# Altium PCB PCB1.PcbDoc
Units mm, origin at the board's own origin, x right, y up, seen from the top; angles counter-clockwise.
Board outline 40 x 40 mm, 2 copper layers (Top Layer, Bottom Layer); 13 components, 11 nets, 38 pads, 0 vias.
Unrouted connection lines stored in the file: 5.
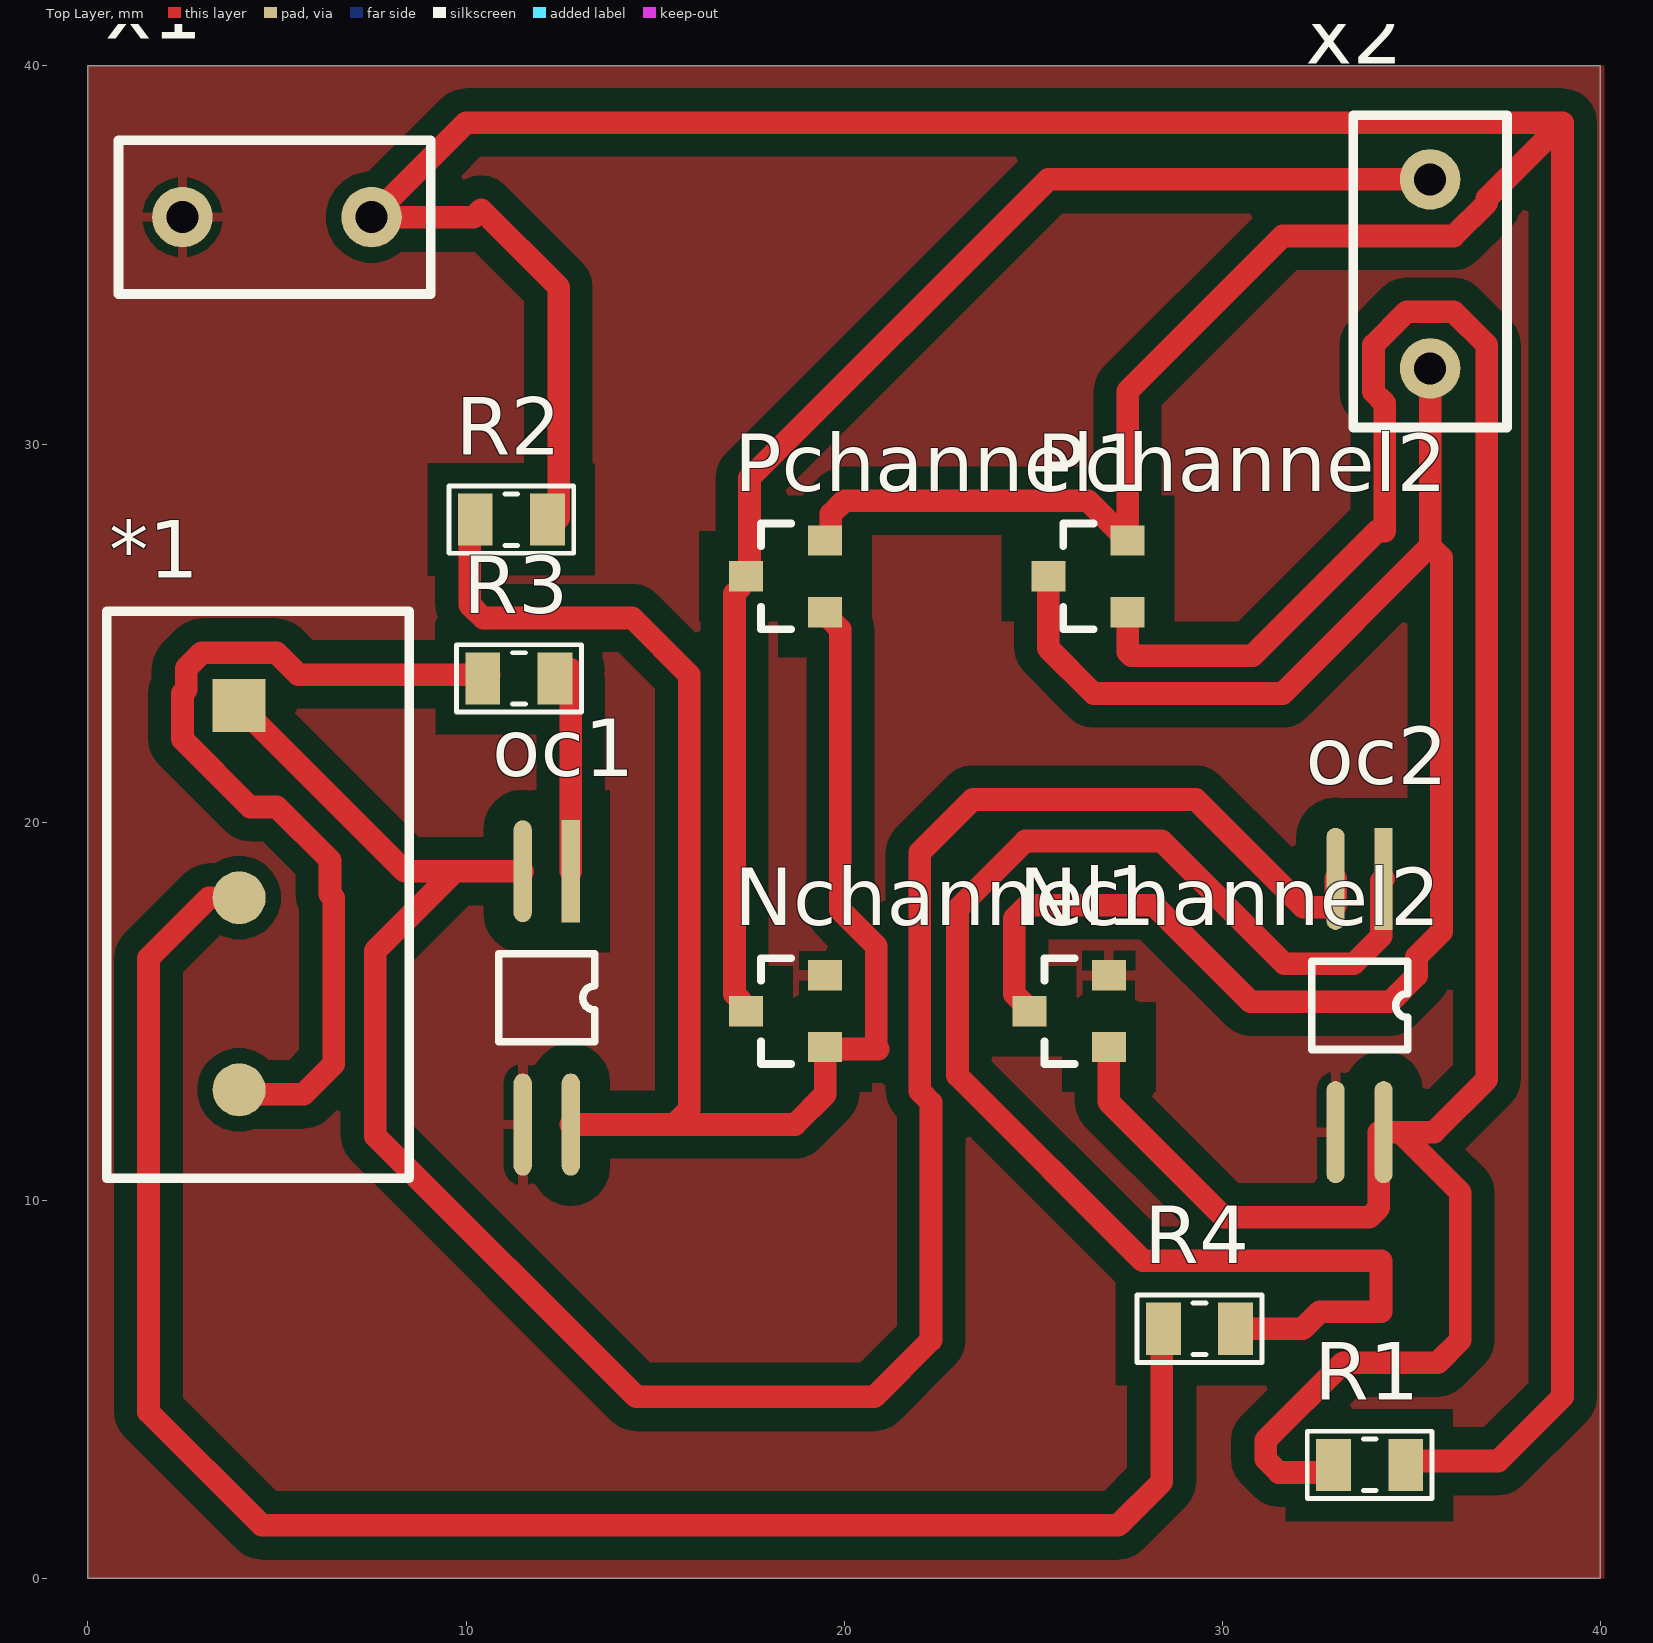
[diagram p0: Top Layer view]
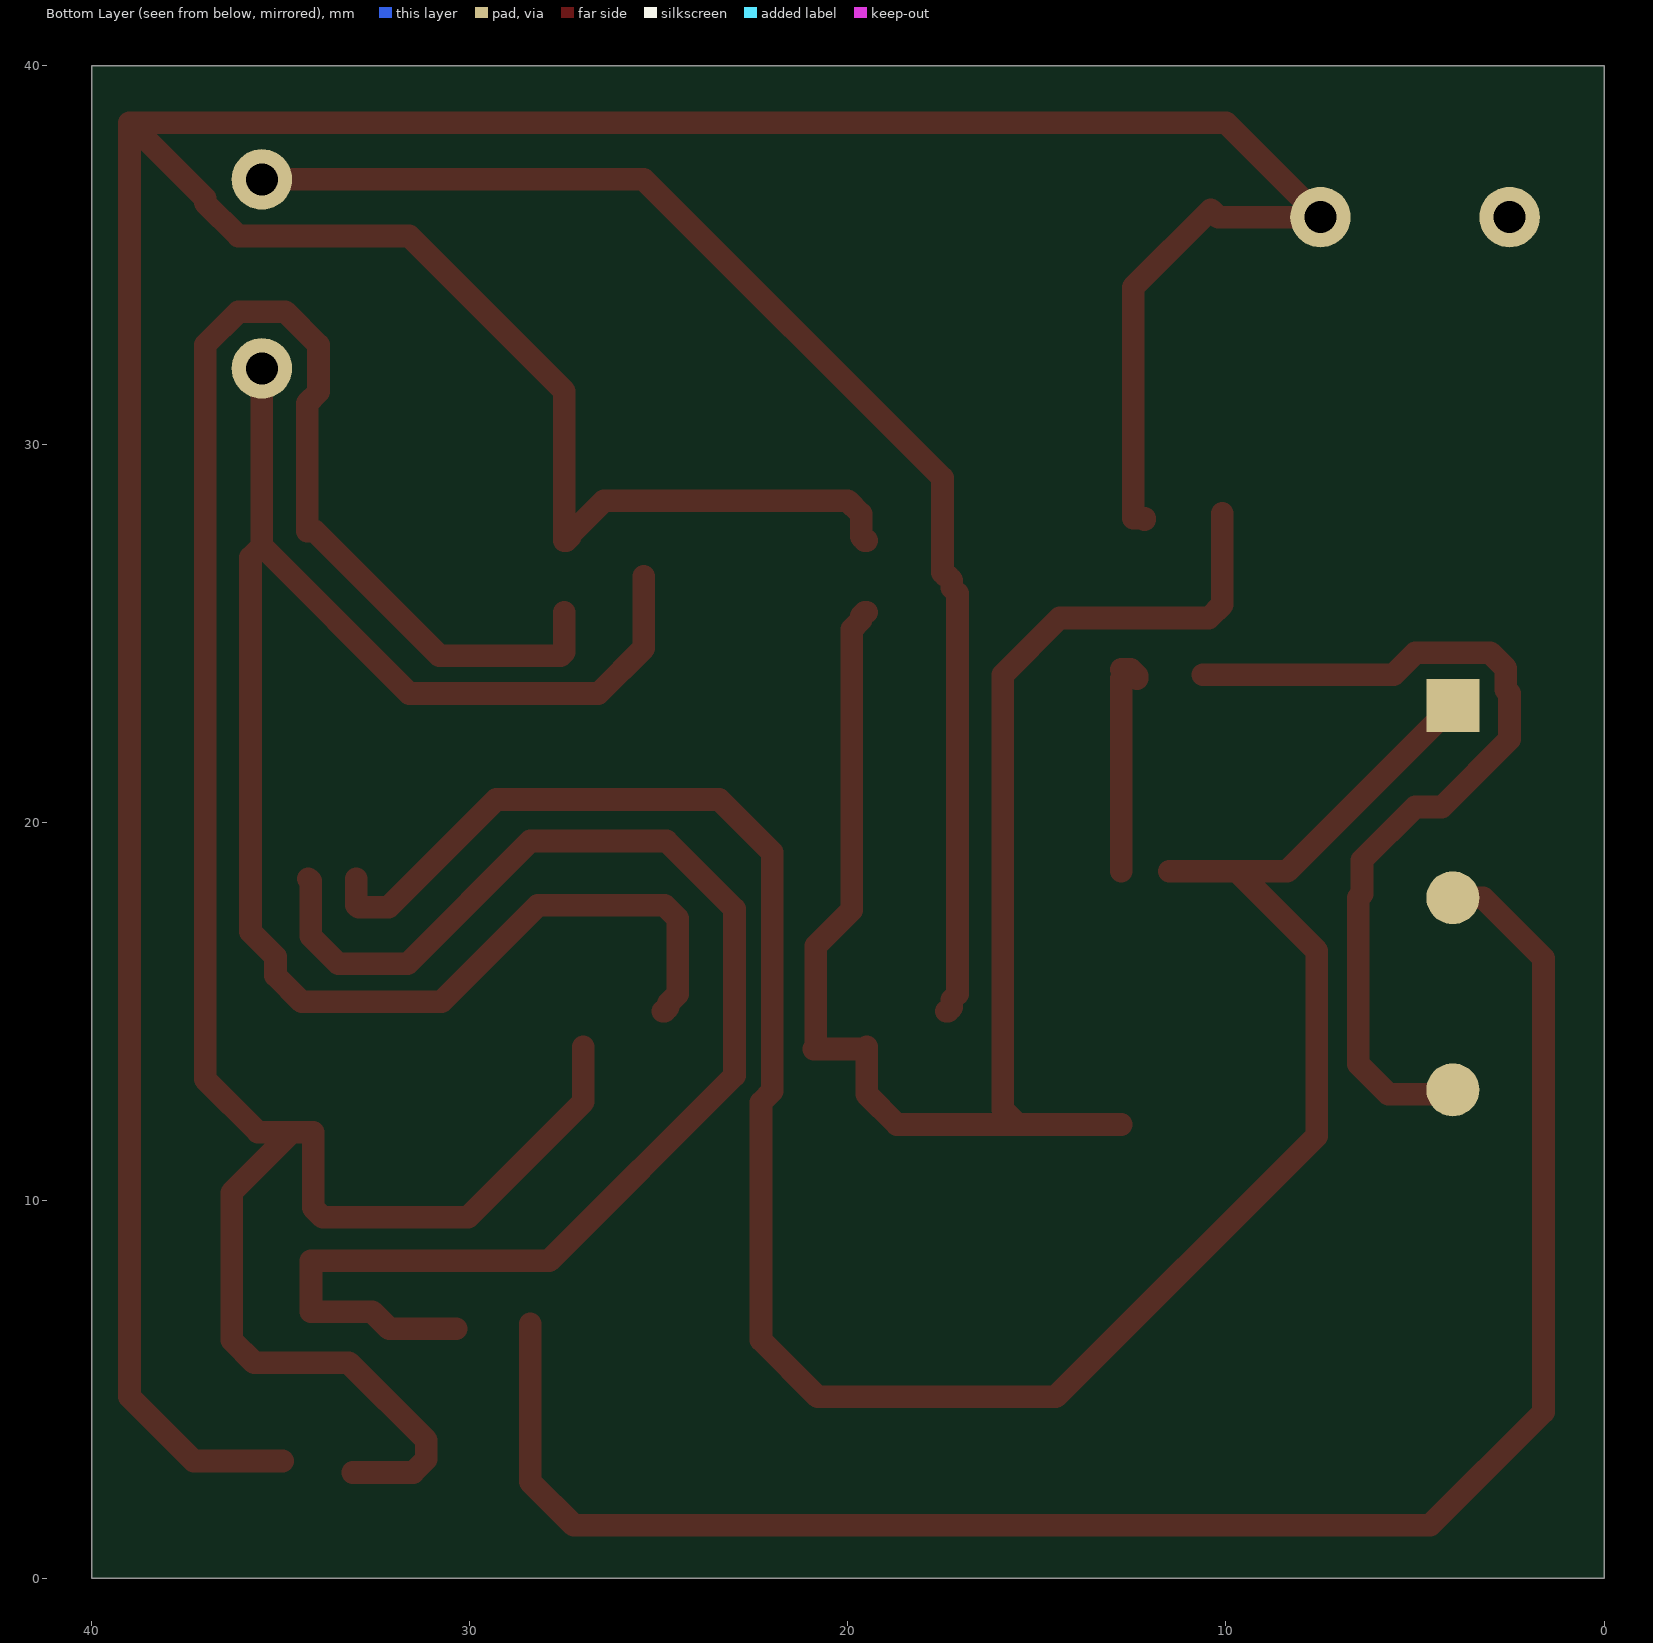
[diagram p1: Bottom Layer view, seen from below]
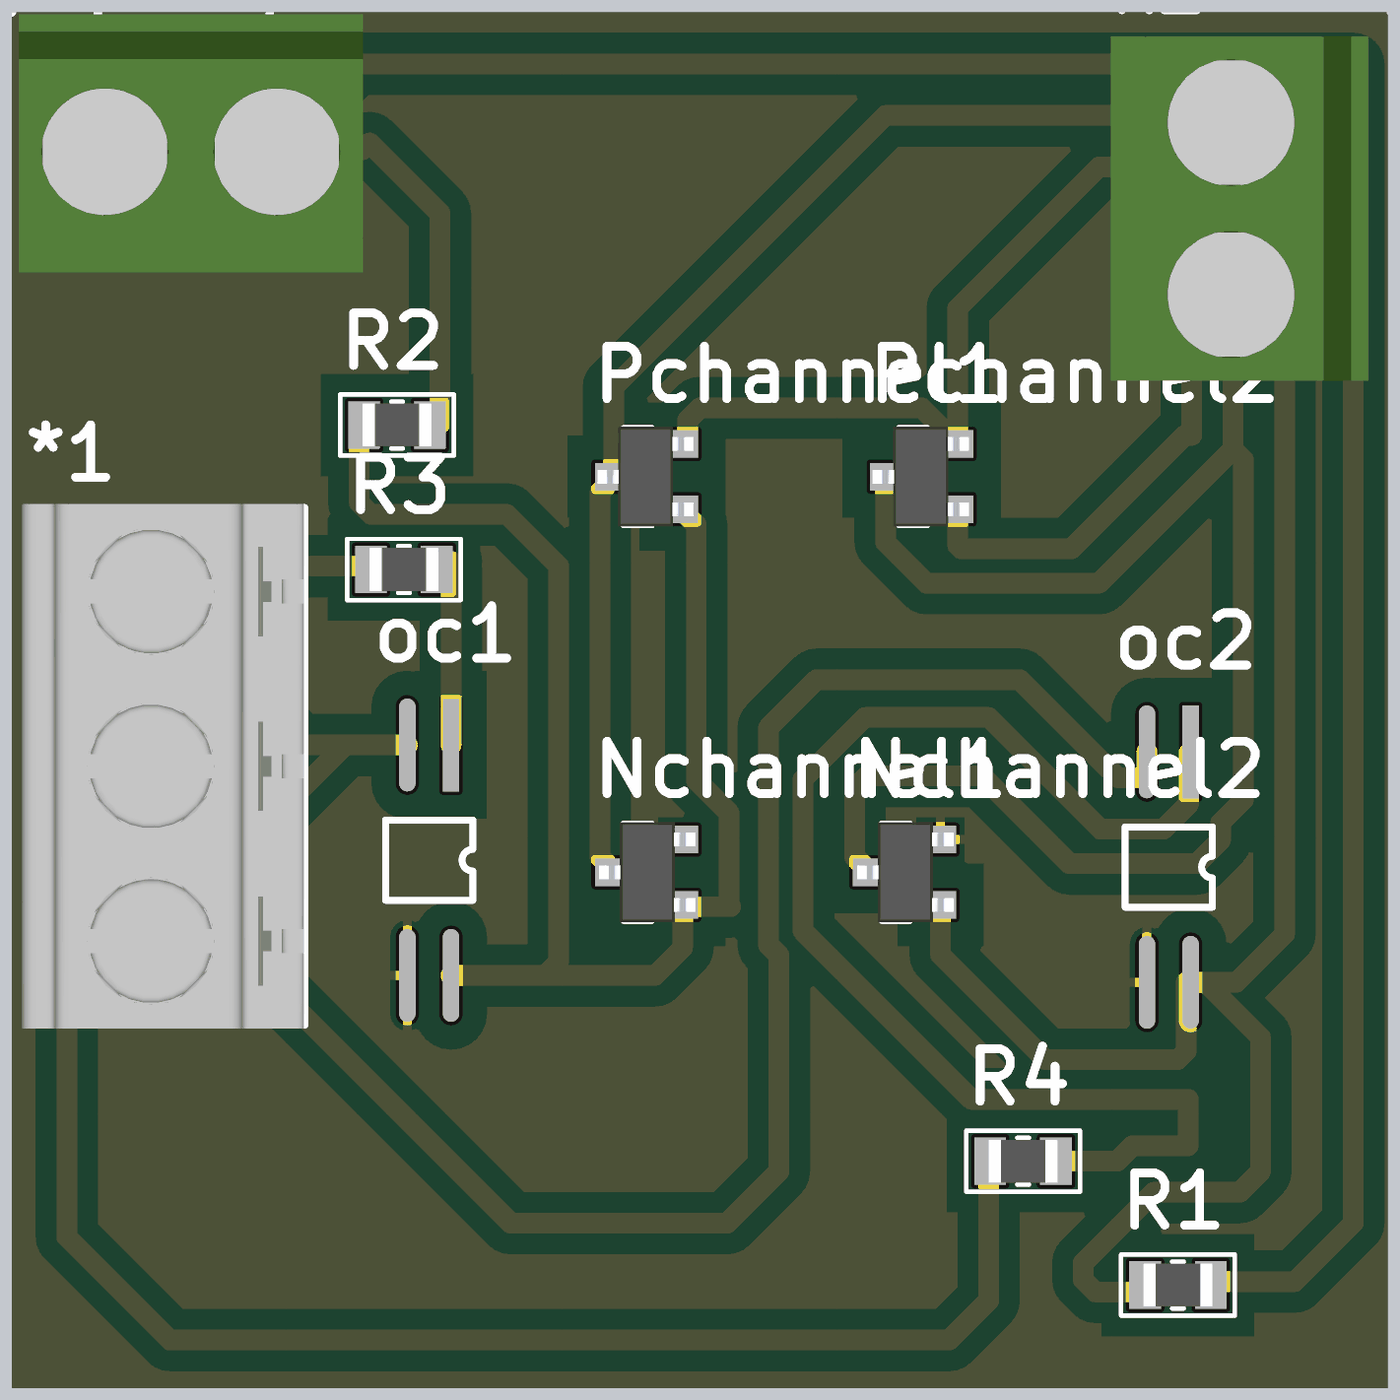
[diagram p2: 3D render of the assembled board from above, using the file's embedded part models]

## Layer stack, top to bottom
Top Solder: solder mask 0.0102, Solder Resist, Dk 3.5
Top Layer: signal copper 0.0356
Dielectric 1: dielectric 0.32, FR-4, Dk 4.8
Bottom Layer: signal copper 0.0356
Bottom Solder: solder mask 0.0102, Solder Resist, Dk 3.5

## Board outline
0,0 40,0 40,40 0,40

## Design rules (kind name [scope] priority, off if disabled: settings)
Clearance Clearance_1 [InNamedPolygon('PGND_L01_P005')] p1: gap=0.254 ignorepadtopadclearanceinfootprint=FALSE except(0: Arc-Hole Track-Hole SMDPad-Hole THPad-Hole Via-Hole Fill-Hole Poly-Hole Region-Hole Text-Hole; 0.4: Track-Poly SMDPad-Poly THPad-Poly)
Clearance [All] p2: gap=0.254 ignorepadtopadclearanceinfootprint=FALSE except(0: Arc-Hole Track-Hole SMDPad-Hole THPad-Hole Via-Hole Fill-Hole Poly-Hole Region-Hole Text-Hole; 0.4: Arc-Arc Arc-Track Arc-THPad Track-Track Track-THPad THPad-Poly; 0.6: Arc-SMDPad Track-SMDPad Track-Poly THPad-THPad; 0.8: SMDPad-SMDPad SMDPad-THPad SMDPad-Poly)
PlaneClearance [All] p1: clearance=0.8
PolygonConnect [All] p1: connectstyle=Relief reliefconductorwidth=0.254 reliefentries=4 polygonreliefangle="90 Angle" airgapwidth=0.254
RoutingVias [All] p1: holewidth=0.711 width=1.27 viastyle="Through Hole" minholewidth=0.711 minwidth=1.27 maxholewidth=0.711 maxwidth=1.27
SolderMaskExpansion [All] p1: expansion=0.102 istentingtop=FALSE
Width [All] p1: maxlimit=0.6 minlimit=0.254 preferedwidth=0.6 toplayer_minwidth=0.6 bottomlayer_maxwidth=0.254 bottomlayer_prefwidth=0.254 minimp=50.000000 maximp=50.000000 favimp=50.000000
29 further rules are at their usual default settings.

## Components (designator, comment, footprint, x,y, rotation, side; value= is the part's Value field where it differs from the comment)
*1 "SignalInput" "Terminal block 3" 4,23.08 r270 top
Nchannel1 "A03400" A03400 18.5,15 r90 top
Nchannel2 "A03400" A03400 26,15 r90 top
oc1 "TLP291 SOP-4" "TLP291 SOP-4" 12.77,18.7 r270 top
oc2 "TLP291 SOP-4" "TLP291 SOP-4" 34.27,18.5 r270 top
Pchannel1 "A03401" A03401 18.5,26.5 r90 top
Pchannel2 "A03401" A03401 26.5,26.5 r90 top
R1 "10k" resss_smd 33.9,3 r0 top
R2 "10k" resss_smd 11.2,28 r0 top
R3 "330" resss_smd 11.4,23.8 r0 top
R4 "330" resss_smd 29.4,6.6 r180 top
x1 "Powerinput" "Terminal Block" 5,36 r0 top
x2 "Motor_1" "Terminal Block" 35.5,34.5 r270 top

## Footprints (in the part's own frame and the unit in brackets; to place one, negate y for a bottom-side part, rotate by r counter-clockwise, add the part's x,y. Pads: shape width x height; smd on the part's side, far side on the other; paste and mask are expansions set on the pad)
A03400 [mm]
  rect 0.8x0.9 smd: 1(-0.95,-1) 2(0.95,-1) 3(0,1.1)
  silkscreen extent -1.4,-0.1 1.4,0.7, body extent -1.45,-1.37 1.45,1.43, height 1.25
A03401 [mm]
  rect 0.8x0.9 smd: 1(-0.95,-1) 2(0.95,-1) 3(0,1.1)
  silkscreen extent -1.4,-0.1 1.4,0.7, body extent -1.45,-1.32 1.45,1.48, height 1.25
resss_smd [mm]
  rect 0.92x1.38 smd: 1(-0.955,0) 2(0.955,0)
  silkscreen extent -1.65,-0.89 1.65,0.89, body extent -1,-0.63 1,0.63, height 0.6
"Terminal Block" [mm]
  round 1.6 hole 0.85: 1(-2.5,0) 2(2.5,0)
  silkscreen extent -4.19,-2.03 4.06,2.03, body extent -4.79,-3.56 5.21,3.94, height 11.5
"Terminal block 3" [mm]
  rect 1.4x1.4 all layers, no hole: 1(0,0) 1(0,0)
  round 1.4 all layers, no hole: 2(5.08,0) 2(5.08,0) 3(10.16,0) 3(10.16,0)
  silkscreen extent -2.5,-3.5 12.5,4.5, body extent -2.62,-3.7 12.62,4.5, height 11.4
"TLP291 SOP-4" [mm]
  rect 2.7x0.48 smd: 1(0,0)
  oval 2.7x0.48 smd: 2(0,-1.27) 3(6.7,-1.27) 4(6.7,0)
  silkscreen extent 2.18,-1.9 4.51,0.64

## Part data
*1: library part "Terminal block 3"
R1 R2 R3 R4: library part resss_smd, "910 Ohms Â±1% 0.125W, 1/8W Chip Resistor 0805 (2012 Metric) Moisture Resistant Thick Film", Package="2012 Rohm Semiconductor", Availability="In Stock", MF=Yageo, MP=RC0805FR-07910RL, Price=None, Purchase-URL=https://pricing.snapeda.com/search/part/RC0805FR-07910RL/?ref=eda
x1 x2: library part "Terminal Block"

## Nets (pads, with @x,y where several pads share a name; then routed paths per layer and width w, separated by ;. In a path a pad name is that pad's centre, name@x,y a point inside that pad or via, vN(x,y) a via of type N, cw(c..) or ccw(c..) an arc to the next point about the centre after c; other vN are vias at no path point)
+12: Pchannel1.2 Pchannel2.2 R1.2 R2.2 x1.2 | length 111
  Top Layer w0.6: R2.2 12.155,28.04 12.45,28.04 12.45,34.15 10.4,36.2 10.2,36 x1.2 10,38.5 39,38.5 ; Pchannel1.2 19.55,27.45 19.65,27.55 19.65,28.149 20.001,28.5 26.45,28.5 27.35,27.6 27.35,27.55 27.45,27.45 Pchannel2.2 27.5,31.4 31.6,35.5 36.121,35.5 37,36.379 37,36.5 39,38.5 ; R1.2@34.955,3.1 37.3,3.1 39,4.8 39,38.5
GND: *1.1 oc1.2 oc2.2 | length 61.9
  Top Layer w0.6: *1.1@4,23.08 8.38,18.7 9.7,18.7 ; oc1.2 9.7,18.7 ; oc2.2 33,17.809 32.94,17.749 32.151,17.749 29.3,20.6 23.4,20.6 22,19.2 22,12.886 22.3,12.586 22.3,6.3 20.8,4.8 14.5,4.8 7.6,11.7 7.6,16.6 9.7,18.7
Net*1_2: *1.2 R4.2 | length 47.8
  Top Layer w0.6: *1.2@4,18 3.2,18 1.6,16.4 1.6,4.4 4.6,1.4 27.25,1.4 28.4,2.55 R4.2@28.4,6.724
Net*1_3: *1.3 R3.1 | length 23.9
  Top Layer w0.6: *1.3@4,12.92 4.12,12.8 5.7,12.8 6.5,13.6 6.5,18 6.4,18.1 6.4,18.994 4.994,20.4 4.29,20.4 2.5,22.19 2.5,23.4 2.6,23.5 2.6,24.07 3.01,24.48 4.99,24.48 5.57,23.9 R3.1@10.607,23.9
NetNchannel1_1: Nchannel1.1 oc1.4 Pchannel1.1 R2.1 | length 42.9
  Top Layer w0.6: R2.1@10.1,28.16 10.1,25.751 10.451,25.4 14.4,25.4 15.9,23.9 15.9,12.4 15.5,12 ; oc1.4 15.5,12 ; Pchannel1.1 19.55,25.55 19.65,25.45 19.65,25.349 19.9,25.099 19.9,17.673 20.85,16.723 20.85,14.05 20.9,14 19.55,14 Nchannel1.1 19.5,12.8 18.7,12 15.5,12
NetNchannel1_3: Nchannel1.3 Pchannel1.3 x2.1 | length 35.7
  Top Layer w0.6: Nchannel1.3 17.35,15 17.25,15.1 17.25,15.301 17.1,15.451 17.1,26.049 17.25,26.199 17.25,26.4 17.35,26.5 Pchannel1.3 17.5,26.6 17.5,29.1 25.4,37 x2.1
NetNchannel2_1: Nchannel2.1 oc2.4 Pchannel2.1 R1.1 | length 67.9
  Top Layer w0.6: Nchannel2.1 27,12.6 30.05,9.55 33.894,9.55 34.14,9.796 34.14,11.8 oc2.4 34.7,11.8 ; Pchannel2.1 27.5,24.5 27.6,24.4 30.8,24.4 34.1,27.7 34.3,27.7 34.3,31.079 34,31.379 34,32.621 34.879,33.5 36.121,33.5 37,32.621 37,13.2 35.6,11.8 34.7,11.8 ; R1.1@33.1,2.8 31.5,2.8 31.149,3.151 31.149,3.649 33.2,5.7 35.7,5.7 36.3,6.3 36.3,10.2 34.7,11.8
NetNchannel2_3: Nchannel2.3 Pchannel2.3 x2.2 | length 45.3
  Top Layer w0.6: Nchannel2.3 24.85,15 24.75,15.1 24.75,15.201 24.5,15.451 24.5,17.449 24.851,17.8 28.2,17.8 30.75,15.25 34.448,15.25 35.14,15.942 35.14,16.44 35.8,17.1 35.8,27 35.5,27.3 ; Pchannel2.3 25.4,24.6 26.6,23.4 31.6,23.4 35.5,27.3 ; x2.2 35.5,27.3
Netoc1_1: oc1.1 R3.2 | length 5.7
  Top Layer w0.6: R3.2 12.355,23.875 12.515,24.035 R3.2@12.77,24.035 ; oc1.1 R3.2@12.77,23.8
Netoc2_1: oc2.1 R4.1 | length 38.2
  Top Layer w0.6: R4.1 32.132,6.6 32.583,7.05 34.2,7.05 34.2,8.4 27.9,8.4 23,13.3 23,17.7 24.8,19.5 28.4,19.5 31.65,16.25 33.472,16.25 34.21,16.988 34.21,18.44 oc2.1
PGND: Nchannel1.2 Nchannel2.2 oc1.3 oc2.3 x1.1

## Polygon pours and split planes (outlines as drawn)
PGND on Top Layer "PGND_L01_P001" (solid, pour order 1): 0,40 40.1,40 40.1,0 0,0

## Dimensions
2.5,36 to 7.5,36 on Top Overlay
0,40 to 40.1,39.9 on Top Overlay